# Altium PCB PCB1.PcbDoc
Units mm, origin at the board's own origin, x right, y up, seen from the top; angles counter-clockwise.
Board outline 160 x 55 mm, 4 copper layers (Top Layer, GND, Vs+, Bottom Layer), stack 1.97 mm thick; 41 components, 132 nets, 436 pads, 0 vias.
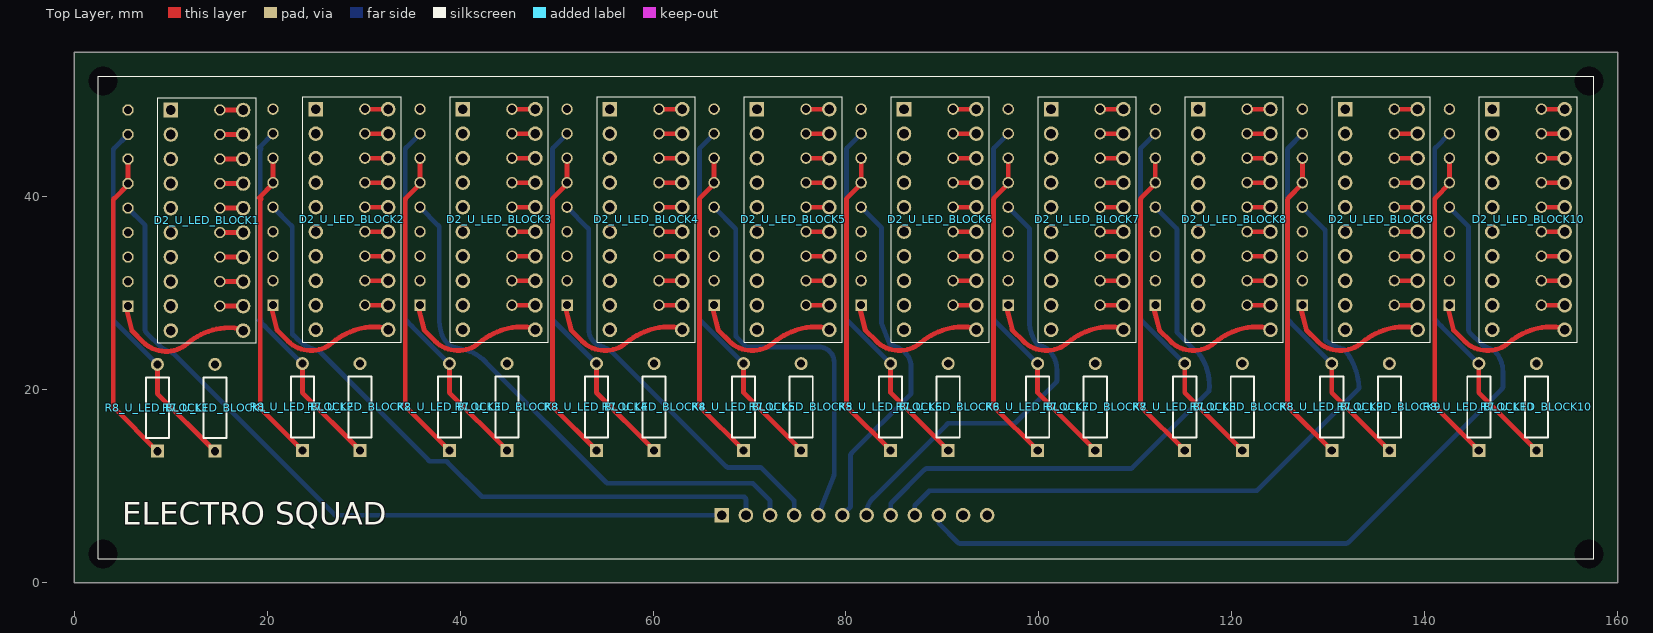
[diagram p0: Top Layer view]
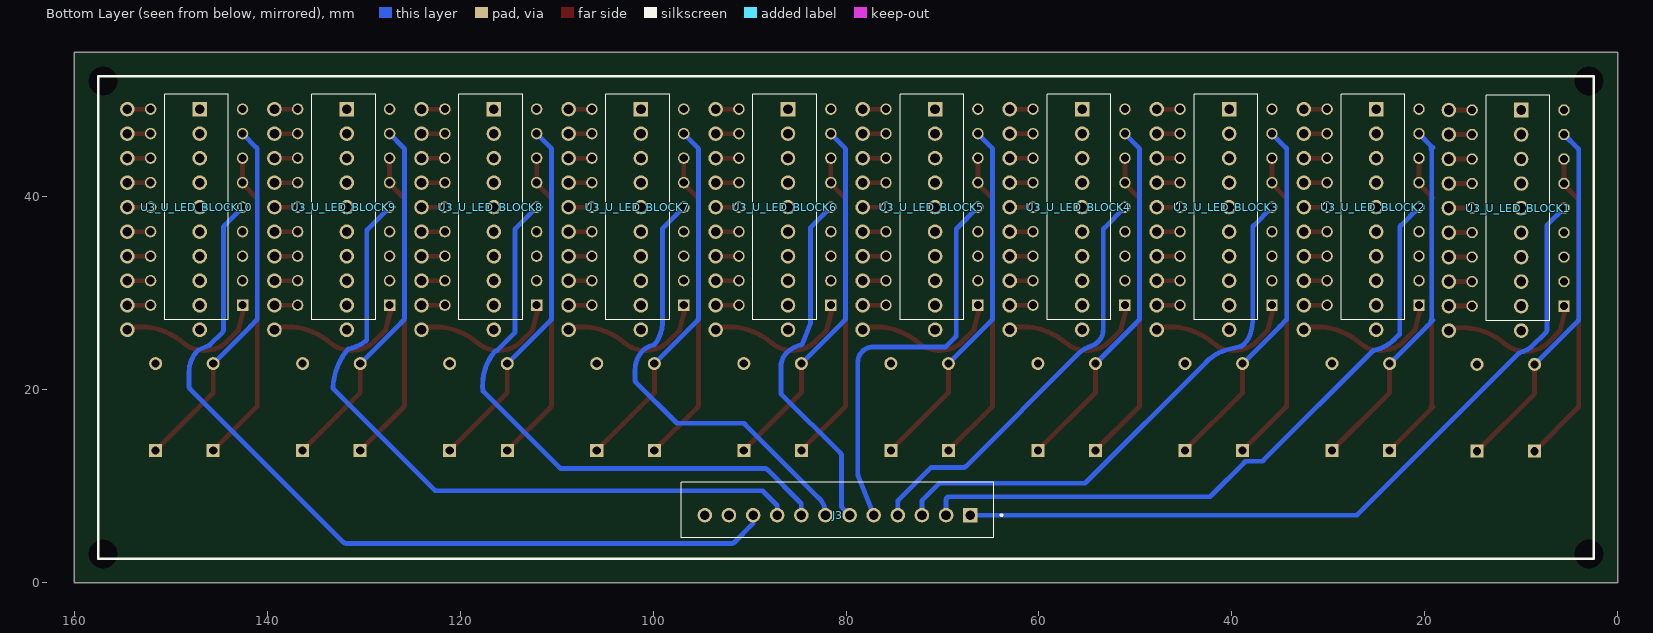
[diagram p1: Bottom Layer view, seen from below]
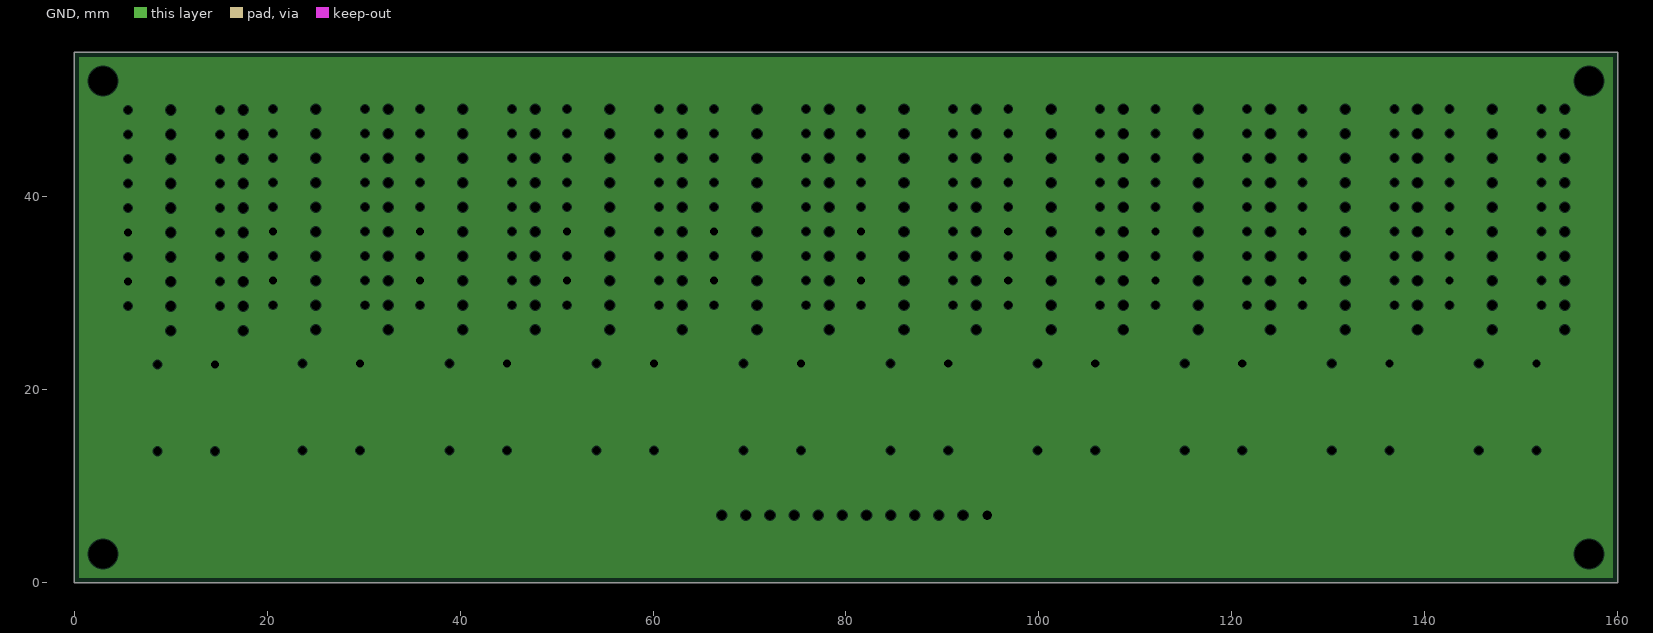
[diagram p2: GND, clearances drawn from the general rule]
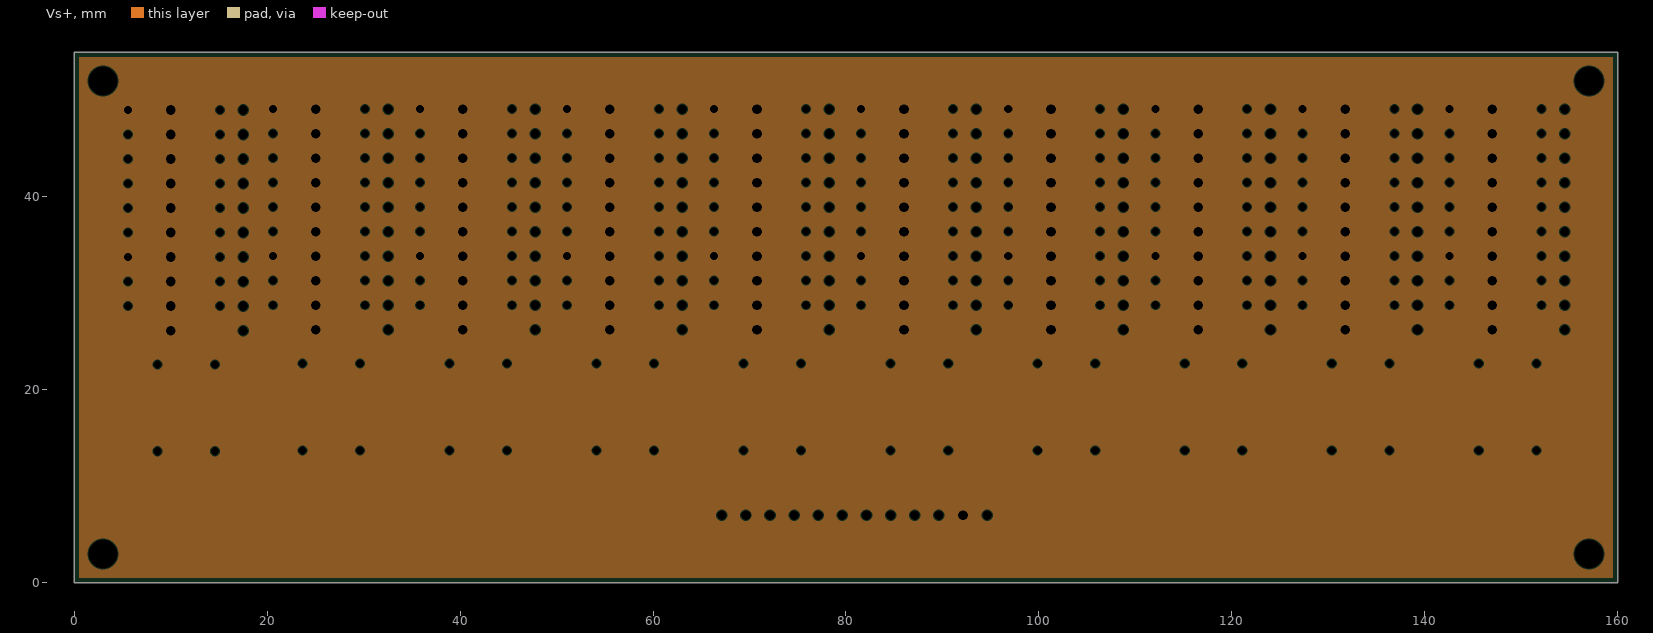
[diagram p3: Vs+, clearances drawn from the general rule]
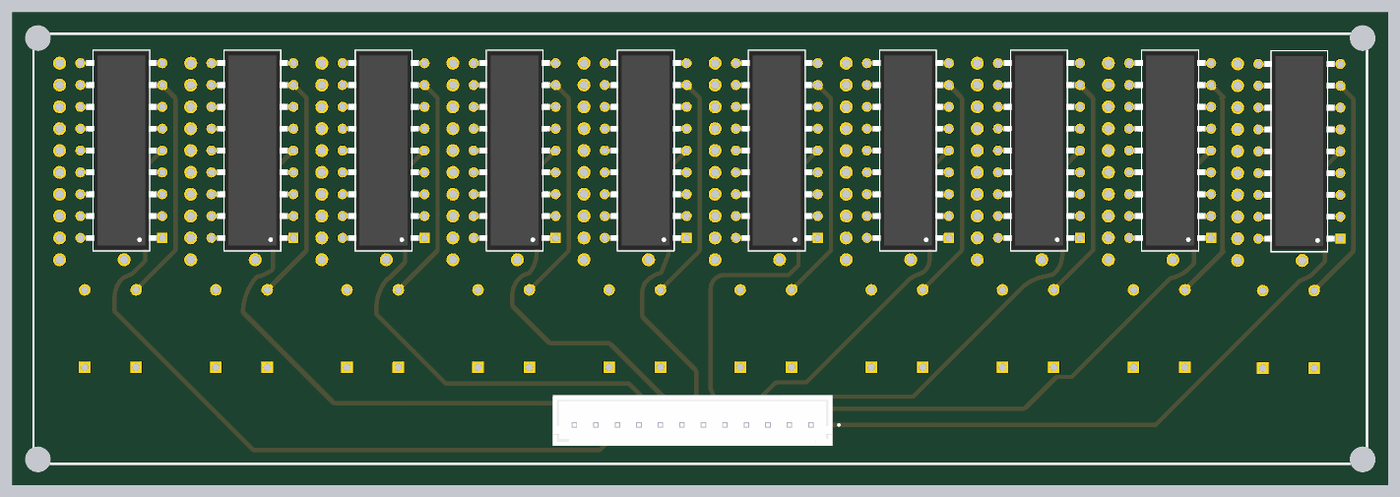
[diagram p4: 3D render of the assembled board from below, using the file's embedded part models]

## Layer stack, top to bottom
Top Solder: solder mask 0.0127, Solder Resist, Dk 3.8
Top Layer: signal copper 0.035
Dielectric 2: prepreg 0.2, 7628, Dk 4.6
GND: plane copper 0.0175, net GND
Dielectric 1: core 1.465, FR-4, Dk 4.5
Vs+: plane copper 0.0175, net Vs+
Dielectric 3: prepreg 0.2, 7628, Dk 4.6
Bottom Layer: signal copper 0.035
Bottom Solder: solder mask 0.0127, Solder Resist, Dk 3.8

## Board outline
0,0 0,55 160,55 160,0

## Design rules (kind name [scope] priority, off if disabled: settings)
BoardOutlineClearance [All] p1: gap=0.2 ignorepadtopadclearanceinfootprint=FALSE
Clearance [All] p1: gap=0.102 ignorepadtopadclearanceinfootprint=FALSE except(0.127: Arc-Via Track-Via SMDPad-Via THPad-Via Via-Via Via-Fill Via-Poly Via-Region Via-Text; 0.25: Arc-Hole Track-Hole SMDPad-Hole THPad-Hole Via-Hole Fill-Hole Poly-Hole Region-Hole Text-Hole)
ComponentClearance [All] p1: gap=0.102 collisioncheckmode=3 verticalgap=0.102 showdistances=TRUE
DiffPairsRouting [All] p1: maxlimit=0.102 minlimit=0.102 mostfreqgap=0.102 toplayer_minwidth=0.102 toplayer_maxwidth=1816.048 toplayer_prefwidth=0.102 bottomlayer_minwidth=0.102 bottomlayer_maxwidth=1816.048 bottomlayer_prefwidth=0.102 maxuncoupledlength=12.7
Height [All] p1: minheight=0 maxheight=1816.048 prefheight=12.7
HoleSize [All] p1: absolutevalues=TRUE maxlimit=6.3 minlimit=0.2 maxpercent=80.000 minpercent=20.000
HoleToHoleClearance [All] p1: gap=0.25 allowstackedmicrovias=FALSE
MinimumAnnularRing [All] p1: minimumring=0.076
MinimumSolderMaskSliver [All] p1: minsoldermaskwidth=0
PlaneClearance [All] p1: clearance=0.102
PlaneConnect PlaneConnectPowerPads [InPadClass('PowerPads')] p1: planeconnectstyle=Direct reliefexpansion=0.508 reliefentries=4 reliefconductorwidth=0.254 reliefairgap=0.254
PlaneConnect [All] p2: pad.planeconnectstyle=Relief pad.reliefexpansion=0.3 pad.reliefentries=4 pad.reliefconductorwidth=0.102 pad.reliefairgap=0.102 via.planeconnectstyle=Direct via.reliefexpansion=0.3 via.reliefentries=4 via.reliefconductorwidth=0.127 via.reliefairgap=0.127
PolygonConnect PolygonConnectPowerPads [All vs (InPadClass('PowerPads'))] p1: connectstyle=Direct reliefconductorwidth=0.254 reliefentries=4 polygonreliefangle="90 Angle" airgapwidth=0.254
PolygonConnect [All] p2: thpad.connectstyle=Relief thpad.reliefconductorwidth=0.102 thpad.reliefentries=4 thpad.polygonreliefangle="90 Angle" thpad.airgapwidth=0.102 smdpad.connectstyle=Relief smdpad.reliefconductorwidth=0.102 smdpad.reliefentries=4 smdpad.polygonreliefangle="90 Angle" smdpad.airgapwidth=0.102 via.connectstyle=Direct via.reliefconductorwidth=0.127 via.reliefentries=4 via.polygonreliefangle="90 Angle" via.airgapwidth=0.127
RoutingVias [All] p1: holewidth=0.2 width=0.45 viastyle="Through Hole" minholewidth=0.2 minwidth=0.45 maxholewidth=6.3 maxwidth=6.55
SilkToSilkClearance [All] p1: silktosilkclearance=0
SilkToSolderMaskClearance [IsPad] p1: minsilkscreentomaskgap=0.102 clearancetoexposedcopper=TRUE
SolderMaskExpansion [All] p1: expansion=0.075 istentingtop=FALSE
Width [All] p1: maxlimit=1816.048 minlimit=0.102 preferedwidth=0.102
20 further rules are at their usual default settings.

## Classes and differential pairs
channel class LED_BLOCK: U_LED_BLOCK1 U_LED_BLOCK2 U_LED_BLOCK3 U_LED_BLOCK4 U_LED_BLOCK5 U_LED_BLOCK6 U_LED_BLOCK7 U_LED_BLOCK8 U_LED_BLOCK9 U_LED_BLOCK10
component class U_LED_BLOCK10: D2_U_LED_BLOCK10 R7_U_LED_BLOCK10 R8_U_LED_BLOCK10 U3_U_LED_BLOCK10
component class U_LED_BLOCK9: D2_U_LED_BLOCK9 R7_U_LED_BLOCK9 R8_U_LED_BLOCK9 U3_U_LED_BLOCK9
component class U_LED_BLOCK8: D2_U_LED_BLOCK8 R7_U_LED_BLOCK8 R8_U_LED_BLOCK8 U3_U_LED_BLOCK8
component class U_LED_BLOCK7: D2_U_LED_BLOCK7 R7_U_LED_BLOCK7 R8_U_LED_BLOCK7 U3_U_LED_BLOCK7
component class U_LED_BLOCK6: D2_U_LED_BLOCK6 R7_U_LED_BLOCK6 R8_U_LED_BLOCK6 U3_U_LED_BLOCK6
component class U_LED_BLOCK5: D2_U_LED_BLOCK5 R7_U_LED_BLOCK5 R8_U_LED_BLOCK5 U3_U_LED_BLOCK5
component class U_LED_BLOCK4: D2_U_LED_BLOCK4 R7_U_LED_BLOCK4 R8_U_LED_BLOCK4 U3_U_LED_BLOCK4
component class U_LED_BLOCK3: D2_U_LED_BLOCK3 R7_U_LED_BLOCK3 R8_U_LED_BLOCK3 U3_U_LED_BLOCK3
component class U_LED_BLOCK2: D2_U_LED_BLOCK2 R7_U_LED_BLOCK2 R8_U_LED_BLOCK2 U3_U_LED_BLOCK2
component class U_LED_BLOCK1: D2_U_LED_BLOCK1 R7_U_LED_BLOCK1 R8_U_LED_BLOCK1 U3_U_LED_BLOCK1
component class Drivers_main: J3

## Components (designator, comment, footprint, x,y, rotation, side; value= is the part's Value field where it differs from the comment)
D2_U_LED_BLOCK1 "DC10EWA" DIP750W50P254L2540H825Q20 13.776,37.566 r0 top (schematic designator D2)
D2_U_LED_BLOCK2 "DC10EWA" DIP750W50P254L2540H825Q20 28.803,37.652 r0 top (schematic designator D2)
D2_U_LED_BLOCK3 "DC10EWA" DIP750W50P254L2540H825Q20 44.043,37.652 r0 top (schematic designator D2)
D2_U_LED_BLOCK4 "DC10EWA" DIP750W50P254L2540H825Q20 59.283,37.652 r0 top (schematic designator D2)
D2_U_LED_BLOCK5 "DC10EWA" DIP750W50P254L2540H825Q20 74.523,37.652 r0 top (schematic designator D2)
D2_U_LED_BLOCK6 "DC10EWA" DIP750W50P254L2540H825Q20 89.763,37.652 r0 top (schematic designator D2)
D2_U_LED_BLOCK7 "DC10EWA" DIP750W50P254L2540H825Q20 105.003,37.652 r0 top (schematic designator D2)
D2_U_LED_BLOCK8 "DC10EWA" DIP750W50P254L2540H825Q20 120.243,37.652 r0 top (schematic designator D2)
D2_U_LED_BLOCK9 "DC10EWA" DIP750W50P254L2540H825Q20 135.483,37.652 r0 top (schematic designator D2)
D2_U_LED_BLOCK10 "DC10EWA" DIP750W50P254L2540H825Q20 150.723,37.652 r0 top (schematic designator D2)
J3 "B12B-XH-A(LF)(SN)" JST_B12B-XH-A(LF)(SN) 80.879,7.529 r180 bottom
R7_U_LED_BLOCK1 "MFR-25FBF5210K" RESA60-630X240 14.605,18.132 r90 top (schematic designator R7)
R7_U_LED_BLOCK2 "MFR-25FBF5210K" RESA60-630X240 29.632,18.218 r90 top (schematic designator R7)
R7_U_LED_BLOCK3 "MFR-25FBF5210K" RESA60-630X240 44.872,18.218 r90 top (schematic designator R7)
R7_U_LED_BLOCK4 "MFR-25FBF5210K" RESA60-630X240 60.112,18.218 r90 top (schematic designator R7)
R7_U_LED_BLOCK5 "MFR-25FBF5210K" RESA60-630X240 75.352,18.218 r90 top (schematic designator R7)
R7_U_LED_BLOCK6 "MFR-25FBF5210K" RESA60-630X240 90.592,18.218 r90 top (schematic designator R7)
R7_U_LED_BLOCK7 "MFR-25FBF5210K" RESA60-630X240 105.832,18.218 r90 top (schematic designator R7)
R7_U_LED_BLOCK8 "MFR-25FBF5210K" RESA60-630X240 121.072,18.218 r90 top (schematic designator R7)
R7_U_LED_BLOCK9 "MFR-25FBF5210K" RESA60-630X240 136.312,18.218 r90 top (schematic designator R7)
R7_U_LED_BLOCK10 "MFR-25FBF5210K" RESA60-630X240 151.552,18.218 r90 top (schematic designator R7)
R8_U_LED_BLOCK1 "MFR-25FBF5210K" RESA60-630X240 8.636,18.132 r90 top (schematic designator R8)
R8_U_LED_BLOCK2 "MFR-25FBF5210K" RESA60-630X240 23.663,18.218 r90 top (schematic designator R8)
R8_U_LED_BLOCK3 "MFR-25FBF5210K" RESA60-630X240 38.903,18.218 r90 top (schematic designator R8)
R8_U_LED_BLOCK4 "MFR-25FBF5210K" RESA60-630X240 54.143,18.218 r90 top (schematic designator R8)
R8_U_LED_BLOCK5 "MFR-25FBF5210K" RESA60-630X240 69.383,18.218 r90 top (schematic designator R8)
R8_U_LED_BLOCK6 "MFR-25FBF5210K" RESA60-630X240 84.623,18.218 r90 top (schematic designator R8)
R8_U_LED_BLOCK7 "MFR-25FBF5210K" RESA60-630X240 99.863,18.218 r90 top (schematic designator R8)
R8_U_LED_BLOCK8 "MFR-25FBF5210K" RESA60-630X240 115.103,18.218 r90 top (schematic designator R8)
R8_U_LED_BLOCK9 "MFR-25FBF5210K" RESA60-630X240 130.343,18.218 r90 top (schematic designator R8)
R8_U_LED_BLOCK10 "MFR-25FBF5210K" RESA60-630X240 145.583,18.218 r90 top (schematic designator R8)
U3_U_LED_BLOCK1 "LM3914N-1" DIP952W45P254L2336H533Q18 10.351,38.836 r0 bottom (schematic designator U3)
U3_U_LED_BLOCK2 "LM3914N-1" DIP952W45P254L2336H533Q18 25.377,38.922 r0 bottom (schematic designator U3)
U3_U_LED_BLOCK3 "LM3914N-1" DIP952W45P254L2336H533Q18 40.617,38.922 r0 bottom (schematic designator U3)
U3_U_LED_BLOCK4 "LM3914N-1" DIP952W45P254L2336H533Q18 55.857,38.922 r0 bottom (schematic designator U3)
U3_U_LED_BLOCK5 "LM3914N-1" DIP952W45P254L2336H533Q18 71.097,38.922 r0 bottom (schematic designator U3)
U3_U_LED_BLOCK6 "LM3914N-1" DIP952W45P254L2336H533Q18 86.337,38.922 r0 bottom (schematic designator U3)
U3_U_LED_BLOCK7 "LM3914N-1" DIP952W45P254L2336H533Q18 101.577,38.922 r0 bottom (schematic designator U3)
U3_U_LED_BLOCK8 "LM3914N-1" DIP952W45P254L2336H533Q18 116.817,38.922 r0 bottom (schematic designator U3)
U3_U_LED_BLOCK9 "LM3914N-1" DIP952W45P254L2336H533Q18 132.057,38.922 r0 bottom (schematic designator U3)
U3_U_LED_BLOCK10 "LM3914N-1" DIP952W45P254L2336H533Q18 147.297,38.922 r0 bottom (schematic designator U3)

## Footprints (in the part's own frame and the unit in brackets; to place one, negate y for a bottom-side part, rotate by r counter-clockwise, add the part's x,y. Pads: shape width x height; smd on the part's side, far side on the other; paste and mask are expansions set on the pad)
DIP750W50P254L2540H825Q20 [mm]
  rect 1.508x1.508 hole 1: 1(-3.75,11.43)
  round 1.508 hole 1: 2(-3.75,8.89) 3(-3.75,6.35) 4(-3.75,3.81) 5(-3.75,1.27) 6(-3.75,-1.27) 7(-3.75,-3.81) 8(-3.75,-6.35) 9(-3.75,-8.89) 10(-3.75,-11.43) 11(3.75,-11.43) 12(3.75,-8.89) 13(3.75,-6.35) 14(3.75,-3.81) 15(3.75,-1.27) 16(3.75,1.27) 17(3.75,3.81) 18(3.75,6.35) 19(3.75,8.89) 20(3.75,11.43)
  silkscreen extent -5.08,-12.7 5.08,12.7
DIP952W45P254L2336H533Q18 [mm]
  rect 1.18x1.18 / inner round 1.18 / far side rect 1.18x1.18 hole 0.83: 1(-4.763,10.16)
  round 1.18 hole 0.83: 2(-4.763,7.62) 3(-4.763,5.08) 4(-4.763,2.54) 5(-4.763,0) 6(-4.763,-2.54) 7(-4.763,-5.08) 8(-4.763,-7.62) 9(-4.763,-10.16) 10(4.763,-10.16) 11(4.763,-7.62) 12(4.763,-5.08) 13(4.763,-2.54) 14(4.763,0) 15(4.763,2.54) 16(4.763,5.08) 17(4.763,7.62) 18(4.763,10.16)
  silkscreen extent -3.3,-11.68 3.3,11.68, body extent -4.17,-11.43 4.17,11.43, height 5.33
JST_B12B-XH-A(LF)(SN) [mm]
  rect 1.508x1.508 / inner round 1.508 / far side rect 1.508x1.508 hole 1: 1(13.75,-0.525)
  round 1.508 hole 1: 2(11.25,-0.525) 3(8.75,-0.525) 4(6.25,-0.525) 5(3.75,-0.525) 6(1.25,-0.525) 7(-1.25,-0.525) 8(-3.75,-0.525) 9(-6.25,-0.525) 10(-8.75,-0.525) 11(-11.25,-0.525) 12(-13.75,-0.525)
  silkscreen extent -16.2,-2.88 17.1,2.88, body extent -16.2,-2.88 16.2,2.88, height 7
RESA60-630X240 [mm] "Axial Resistor, 2-Leads, Dia 2.4mm, Body Length 6.3mm"
  rect 1.35x1.35 hole 0.85: 1(-4.5,0)
  round 1.35 hole 0.85: 2(4.5,0)
  silkscreen extent -3.15,-1.2 3.15,1.2, body extent -3.15,-1.2 3.15,1.2, height 2.4

## Part data
D2_U_LED_BLOCK1 D2_U_LED_BLOCK2 D2_U_LED_BLOCK3 D2_U_LED_BLOCK4 D2_U_LED_BLOCK5 D2_U_LED_BLOCK6 D2_U_LED_BLOCK7 D2_U_LED_BLOCK8 D2_U_LED_BLOCK9 D2_U_LED_BLOCK10: "LED Circuit Board Indicator Bar - 10 Wide, DIP Red (x 10) Diffused, White 2V 30mA Through Hole", Package="DIP-20 Kingbright", Availability="In Stock", Check_prices=https://www.snapeda.com/parts/DC10EWA/Kingbright/view-part/268697/?ref=eda, MF=Kingbright, MP=DC10EWA, Price=None, Purchase-URL=https://pricing.snapeda.com/search/part/DC10EWA/?ref=eda, SnapEDA_Link=https://www.snapeda.com/parts/DC10EWA/Kingbright/view-part/268697/?ref=snap
J3: "Connector Header Through Hole 12 position 0.098 (2.50mm)", Package=None, Check_prices=https://www.snapeda.com/parts/B12B-XH-A(LF)(SN)/JST+Sales+America+Inc./view-part/?ref=eda, MF="JST Sales", MP=B12B-XH-A(LF)(SN), SnapEDA_Link=https://www.snapeda.com/parts/B12B-XH-A(LF)(SN)/JST+Sales+America+Inc./view-part/?ref=snap
R7_U_LED_BLOCK1 R7_U_LED_BLOCK2 R7_U_LED_BLOCK3 R7_U_LED_BLOCK4 R7_U_LED_BLOCK5 R7_U_LED_BLOCK6 R7_U_LED_BLOCK7 R7_U_LED_BLOCK8 R7_U_LED_BLOCK9 R7_U_LED_BLOCK10 R8_U_LED_BLOCK1 R8_U_LED_BLOCK2 R8_U_LED_BLOCK3 R8_U_LED_BLOCK4 R8_U_LED_BLOCK5 R8_U_LED_BLOCK6 R8_U_LED_BLOCK7 R8_U_LED_BLOCK8 R8_U_LED_BLOCK9 R8_U_LED_BLOCK10: library part CMP-1659-00074-2, "Axial Resistor, 10 KOhm, +/- 1%, 0.25 W, -55 to 155 degC, 2-Pin THD, RoHS, Bulk", Case\/Package=Axial, Manufacturer=Yageo, Max Operating Temperature=155degC, Max Power Dissipation=250mW, Min Operating Temperature=-55degC, Package Description="2-Pin Axial Lead, Dia 2.4 mm, Body Length 6.3 mm", Package Quantity=200, Package Reference=MFR-25, Resistance=10KOhm, Temperature Coefficient=100ppm\/degreesC, Tolerance=1%, Voltage Rating=250V, Voltage Rating (DC)=200V, Composition=MetalFilm, Datasheet URL=http://www.yageo.com/documents/recent/Yageo%20LR_MFR_2013.pdf, Datasheet Version=04/2013, Lead Free=LeadFree, Length=0.248inch, Manufacturer URL=http://www.yageo.com/, Military Standard=Not, Mount=ThroughHole, Mounting Technology=ThroughHole, Number of Terminations=2, Packaging=Bulk, Power Rating=250mW, RoHSCompliant=True, Termination=Axial
U3_U_LED_BLOCK1 U3_U_LED_BLOCK2 U3_U_LED_BLOCK3 U3_U_LED_BLOCK4 U3_U_LED_BLOCK5 U3_U_LED_BLOCK6 U3_U_LED_BLOCK7 U3_U_LED_BLOCK8 U3_U_LED_BLOCK9 U3_U_LED_BLOCK10: "LED, LCD, Vacuum Fluorescent (VF) Driver 18-PDIP", Package="DIP-18 Texas Instruments", Check_prices=https://www.snapeda.com/parts/LM3914N-1/Texas+Instruments/view-part/?ref=eda, MF="Texas Instruments", MP=LM3914N-1, SnapEDA_Link=https://www.snapeda.com/parts/LM3914N-1/Texas+Instruments/view-part/?ref=snap

## Free pads (board coordinates)
  round 1.524 hole 3 unplated: 2(3,3) 2(3,52) 2(157,3) 2(157,52)

## Nets (pads, with @x,y where several pads share a name; then routed paths per layer and width w, separated by ;. In a path a pad name is that pad's centre, name@x,y a point inside that pad or via, vN(x,y) a via of type N, cw(c..) or ccw(c..) an arc to the next point about the centre after c; other vN are vias at no path point)
GND: J3.12 R7_U_LED_BLOCK1.2 R7_U_LED_BLOCK2.2 R7_U_LED_BLOCK3.2 R7_U_LED_BLOCK4.2 R7_U_LED_BLOCK5.2 R7_U_LED_BLOCK6.2 R7_U_LED_BLOCK7.2 R7_U_LED_BLOCK8.2 R7_U_LED_BLOCK9.2 R7_U_LED_BLOCK10.2 U3_U_LED_BLOCK1.2 U3_U_LED_BLOCK1.4 U3_U_LED_BLOCK2.2 U3_U_LED_BLOCK2.4 U3_U_LED_BLOCK3.2 U3_U_LED_BLOCK3.4 U3_U_LED_BLOCK4.2 U3_U_LED_BLOCK4.4 U3_U_LED_BLOCK5.2 U3_U_LED_BLOCK5.4 U3_U_LED_BLOCK6.2 U3_U_LED_BLOCK6.4 U3_U_LED_BLOCK7.2 U3_U_LED_BLOCK7.4 U3_U_LED_BLOCK8.2 U3_U_LED_BLOCK8.4 U3_U_LED_BLOCK9.2 U3_U_LED_BLOCK9.4 U3_U_LED_BLOCK10.2 U3_U_LED_BLOCK10.4
NetD2_U_LED_BLOCK1_11: D2_U_LED_BLOCK1.11 U3_U_LED_BLOCK1.1 | length 15.6
  Top Layer w0.5: U3_U_LED_BLOCK1.1 5.448,28.336 ccw(c5.741,28.358) 5.456,28.285 5.99,26.173 ccw(c6.276,26.245) 6.067,26.038 7.129,24.975 ccw(c9.54,27.375) 11.755,24.794 cw(c16.19,19.63) 16.44,26.433 cw(c16.347,24.055) 17.297,26.237 D2_U_LED_BLOCK1.11
NetD2_U_LED_BLOCK1_12: D2_U_LED_BLOCK1.12 U3_U_LED_BLOCK1.18 | length 2.4
  Top Layer w0.5: U3_U_LED_BLOCK1.18 D2_U_LED_BLOCK1.12
NetD2_U_LED_BLOCK1_13: D2_U_LED_BLOCK1.13 U3_U_LED_BLOCK1.17 | length 2.4
  Top Layer w0.5: U3_U_LED_BLOCK1.17 D2_U_LED_BLOCK1.13
NetD2_U_LED_BLOCK1_14: D2_U_LED_BLOCK1.14 U3_U_LED_BLOCK1.16 | length 2.4
  Top Layer w0.5: U3_U_LED_BLOCK1.16 D2_U_LED_BLOCK1.14
NetD2_U_LED_BLOCK1_15: D2_U_LED_BLOCK1.15 U3_U_LED_BLOCK1.15 | length 2.4
  Top Layer w0.5: U3_U_LED_BLOCK1.15 D2_U_LED_BLOCK1.15
NetD2_U_LED_BLOCK1_16: D2_U_LED_BLOCK1.16 U3_U_LED_BLOCK1.14 | length 2.4
  Top Layer w0.5: U3_U_LED_BLOCK1.14 D2_U_LED_BLOCK1.16
NetD2_U_LED_BLOCK1_17: D2_U_LED_BLOCK1.17 U3_U_LED_BLOCK1.13 | length 2.4
  Top Layer w0.5: U3_U_LED_BLOCK1.13 D2_U_LED_BLOCK1.17
NetD2_U_LED_BLOCK1_18: D2_U_LED_BLOCK1.18 U3_U_LED_BLOCK1.12 | length 2.4
  Top Layer w0.5: U3_U_LED_BLOCK1.12 D2_U_LED_BLOCK1.18
NetD2_U_LED_BLOCK1_19: D2_U_LED_BLOCK1.19 U3_U_LED_BLOCK1.11 | length 2.4
  Top Layer w0.5: U3_U_LED_BLOCK1.11 D2_U_LED_BLOCK1.19
NetD2_U_LED_BLOCK1_20: D2_U_LED_BLOCK1.20 U3_U_LED_BLOCK1.10 | length 2.4
  Top Layer w0.5: U3_U_LED_BLOCK1.10 D2_U_LED_BLOCK1.20
NetD2_U_LED_BLOCK2_11: D2_U_LED_BLOCK2.11 U3_U_LED_BLOCK2.1 | length 15.6
  Top Layer w0.5: U3_U_LED_BLOCK2.1 20.474,28.422 ccw(c20.768,28.444) 20.483,28.372 21.017,26.259 ccw(c21.302,26.332) 21.093,26.124 22.156,25.062 ccw(c24.566,27.461) 26.781,24.88 cw(c31.217,19.716) 31.467,26.519 cw(c31.374,24.141) 32.324,26.323 D2_U_LED_BLOCK2.11
NetD2_U_LED_BLOCK2_12: D2_U_LED_BLOCK2.12 U3_U_LED_BLOCK2.18 | length 2.4
  Top Layer w0.5: U3_U_LED_BLOCK2.18 D2_U_LED_BLOCK2.12
NetD2_U_LED_BLOCK2_13: D2_U_LED_BLOCK2.13 U3_U_LED_BLOCK2.17 | length 2.4
  Top Layer w0.5: U3_U_LED_BLOCK2.17 D2_U_LED_BLOCK2.13
NetD2_U_LED_BLOCK2_14: D2_U_LED_BLOCK2.14 U3_U_LED_BLOCK2.16 | length 2.4
  Top Layer w0.5: U3_U_LED_BLOCK2.16 D2_U_LED_BLOCK2.14
NetD2_U_LED_BLOCK2_15: D2_U_LED_BLOCK2.15 U3_U_LED_BLOCK2.15 | length 2.4
  Top Layer w0.5: U3_U_LED_BLOCK2.15 D2_U_LED_BLOCK2.15
NetD2_U_LED_BLOCK2_16: D2_U_LED_BLOCK2.16 U3_U_LED_BLOCK2.14 | length 2.4
  Top Layer w0.5: U3_U_LED_BLOCK2.14 D2_U_LED_BLOCK2.16
NetD2_U_LED_BLOCK2_17: D2_U_LED_BLOCK2.17 U3_U_LED_BLOCK2.13 | length 2.4
  Top Layer w0.5: U3_U_LED_BLOCK2.13 D2_U_LED_BLOCK2.17
NetD2_U_LED_BLOCK2_18: D2_U_LED_BLOCK2.18 U3_U_LED_BLOCK2.12 | length 2.4
  Top Layer w0.5: U3_U_LED_BLOCK2.12 D2_U_LED_BLOCK2.18
NetD2_U_LED_BLOCK2_19: D2_U_LED_BLOCK2.19 U3_U_LED_BLOCK2.11 | length 2.4
  Top Layer w0.5: U3_U_LED_BLOCK2.11 D2_U_LED_BLOCK2.19
NetD2_U_LED_BLOCK2_20: D2_U_LED_BLOCK2.20 U3_U_LED_BLOCK2.10 | length 2.4
  Top Layer w0.5: U3_U_LED_BLOCK2.10 D2_U_LED_BLOCK2.20
NetD2_U_LED_BLOCK3_11: D2_U_LED_BLOCK3.11 U3_U_LED_BLOCK3.1 | length 15.6
  Top Layer w0.5: U3_U_LED_BLOCK3.1 35.714,28.422 ccw(c36.008,28.444) 35.723,28.372 36.257,26.259 ccw(c36.542,26.332) 36.333,26.124 37.396,25.062 ccw(c39.806,27.461) 42.021,24.88 cw(c46.457,19.716) 46.707,26.519 cw(c46.614,24.141) 47.564,26.323 D2_U_LED_BLOCK3.11
NetD2_U_LED_BLOCK3_12: D2_U_LED_BLOCK3.12 U3_U_LED_BLOCK3.18 | length 2.4
  Top Layer w0.5: U3_U_LED_BLOCK3.18 D2_U_LED_BLOCK3.12
NetD2_U_LED_BLOCK3_13: D2_U_LED_BLOCK3.13 U3_U_LED_BLOCK3.17 | length 2.4
  Top Layer w0.5: U3_U_LED_BLOCK3.17 D2_U_LED_BLOCK3.13
NetD2_U_LED_BLOCK3_14: D2_U_LED_BLOCK3.14 U3_U_LED_BLOCK3.16 | length 2.4
  Top Layer w0.5: U3_U_LED_BLOCK3.16 D2_U_LED_BLOCK3.14
NetD2_U_LED_BLOCK3_15: D2_U_LED_BLOCK3.15 U3_U_LED_BLOCK3.15 | length 2.4
  Top Layer w0.5: U3_U_LED_BLOCK3.15 D2_U_LED_BLOCK3.15
NetD2_U_LED_BLOCK3_16: D2_U_LED_BLOCK3.16 U3_U_LED_BLOCK3.14 | length 2.4
  Top Layer w0.5: U3_U_LED_BLOCK3.14 D2_U_LED_BLOCK3.16
NetD2_U_LED_BLOCK3_17: D2_U_LED_BLOCK3.17 U3_U_LED_BLOCK3.13 | length 2.4
  Top Layer w0.5: U3_U_LED_BLOCK3.13 D2_U_LED_BLOCK3.17
NetD2_U_LED_BLOCK3_18: D2_U_LED_BLOCK3.18 U3_U_LED_BLOCK3.12 | length 2.4
  Top Layer w0.5: U3_U_LED_BLOCK3.12 D2_U_LED_BLOCK3.18
NetD2_U_LED_BLOCK3_19: D2_U_LED_BLOCK3.19 U3_U_LED_BLOCK3.11 | length 2.4
  Top Layer w0.5: U3_U_LED_BLOCK3.11 D2_U_LED_BLOCK3.19
NetD2_U_LED_BLOCK3_20: D2_U_LED_BLOCK3.20 U3_U_LED_BLOCK3.10 | length 2.4
  Top Layer w0.5: U3_U_LED_BLOCK3.10 D2_U_LED_BLOCK3.20
NetD2_U_LED_BLOCK4_11: D2_U_LED_BLOCK4.11 U3_U_LED_BLOCK4.1 | length 15.6
  Top Layer w0.5: U3_U_LED_BLOCK4.1 50.954,28.422 ccw(c51.248,28.444) 50.963,28.372 51.497,26.259 ccw(c51.782,26.332) 51.573,26.124 52.636,25.062 ccw(c55.046,27.461) 57.261,24.88 cw(c61.697,19.716) 61.947,26.519 cw(c61.854,24.141) 62.804,26.323 D2_U_LED_BLOCK4.11
NetD2_U_LED_BLOCK4_12: D2_U_LED_BLOCK4.12 U3_U_LED_BLOCK4.18 | length 2.4
  Top Layer w0.5: U3_U_LED_BLOCK4.18 D2_U_LED_BLOCK4.12
NetD2_U_LED_BLOCK4_13: D2_U_LED_BLOCK4.13 U3_U_LED_BLOCK4.17 | length 2.4
  Top Layer w0.5: U3_U_LED_BLOCK4.17 D2_U_LED_BLOCK4.13
NetD2_U_LED_BLOCK4_14: D2_U_LED_BLOCK4.14 U3_U_LED_BLOCK4.16 | length 2.4
  Top Layer w0.5: U3_U_LED_BLOCK4.16 D2_U_LED_BLOCK4.14
NetD2_U_LED_BLOCK4_15: D2_U_LED_BLOCK4.15 U3_U_LED_BLOCK4.15 | length 2.4
  Top Layer w0.5: U3_U_LED_BLOCK4.15 D2_U_LED_BLOCK4.15
NetD2_U_LED_BLOCK4_16: D2_U_LED_BLOCK4.16 U3_U_LED_BLOCK4.14 | length 2.4
  Top Layer w0.5: U3_U_LED_BLOCK4.14 D2_U_LED_BLOCK4.16
NetD2_U_LED_BLOCK4_17: D2_U_LED_BLOCK4.17 U3_U_LED_BLOCK4.13 | length 2.4
  Top Layer w0.5: U3_U_LED_BLOCK4.13 D2_U_LED_BLOCK4.17
NetD2_U_LED_BLOCK4_18: D2_U_LED_BLOCK4.18 U3_U_LED_BLOCK4.12 | length 2.4
  Top Layer w0.5: U3_U_LED_BLOCK4.12 D2_U_LED_BLOCK4.18
NetD2_U_LED_BLOCK4_19: D2_U_LED_BLOCK4.19 U3_U_LED_BLOCK4.11 | length 2.4
  Top Layer w0.5: U3_U_LED_BLOCK4.11 D2_U_LED_BLOCK4.19
NetD2_U_LED_BLOCK4_20: D2_U_LED_BLOCK4.20 U3_U_LED_BLOCK4.10 | length 2.4
  Top Layer w0.5: U3_U_LED_BLOCK4.10 D2_U_LED_BLOCK4.20
NetD2_U_LED_BLOCK5_11: D2_U_LED_BLOCK5.11 U3_U_LED_BLOCK5.1 | length 15.6
  Top Layer w0.5: U3_U_LED_BLOCK5.1 66.194,28.422 ccw(c66.488,28.444) 66.203,28.372 66.737,26.259 ccw(c67.022,26.332) 66.813,26.124 67.876,25.062 ccw(c70.286,27.461) 72.501,24.88 cw(c76.937,19.716) 77.187,26.519 cw(c77.094,24.141) 78.044,26.323 D2_U_LED_BLOCK5.11
NetD2_U_LED_BLOCK5_12: D2_U_LED_BLOCK5.12 U3_U_LED_BLOCK5.18 | length 2.4
  Top Layer w0.5: U3_U_LED_BLOCK5.18 D2_U_LED_BLOCK5.12
NetD2_U_LED_BLOCK5_13: D2_U_LED_BLOCK5.13 U3_U_LED_BLOCK5.17 | length 2.4
  Top Layer w0.5: U3_U_LED_BLOCK5.17 D2_U_LED_BLOCK5.13
NetD2_U_LED_BLOCK5_14: D2_U_LED_BLOCK5.14 U3_U_LED_BLOCK5.16 | length 2.4
  Top Layer w0.5: U3_U_LED_BLOCK5.16 D2_U_LED_BLOCK5.14
NetD2_U_LED_BLOCK5_15: D2_U_LED_BLOCK5.15 U3_U_LED_BLOCK5.15 | length 2.4
  Top Layer w0.5: U3_U_LED_BLOCK5.15 D2_U_LED_BLOCK5.15
NetD2_U_LED_BLOCK5_16: D2_U_LED_BLOCK5.16 U3_U_LED_BLOCK5.14 | length 2.4
  Top Layer w0.5: U3_U_LED_BLOCK5.14 D2_U_LED_BLOCK5.16
NetD2_U_LED_BLOCK5_17: D2_U_LED_BLOCK5.17 U3_U_LED_BLOCK5.13 | length 2.4
  Top Layer w0.5: U3_U_LED_BLOCK5.13 D2_U_LED_BLOCK5.17
NetD2_U_LED_BLOCK5_18: D2_U_LED_BLOCK5.18 U3_U_LED_BLOCK5.12 | length 2.4
  Top Layer w0.5: U3_U_LED_BLOCK5.12 D2_U_LED_BLOCK5.18
NetD2_U_LED_BLOCK5_19: D2_U_LED_BLOCK5.19 U3_U_LED_BLOCK5.11 | length 2.4
  Top Layer w0.5: U3_U_LED_BLOCK5.11 D2_U_LED_BLOCK5.19
NetD2_U_LED_BLOCK5_20: D2_U_LED_BLOCK5.20 U3_U_LED_BLOCK5.10 | length 2.4
  Top Layer w0.5: U3_U_LED_BLOCK5.10 D2_U_LED_BLOCK5.20
NetD2_U_LED_BLOCK6_11: D2_U_LED_BLOCK6.11 U3_U_LED_BLOCK6.1 | length 15.6
  Top Layer w0.5: U3_U_LED_BLOCK6.1 81.434,28.422 ccw(c81.728,28.444) 81.443,28.372 81.977,26.259 ccw(c82.262,26.332) 82.053,26.124 83.116,25.062 ccw(c85.526,27.461) 87.741,24.88 cw(c92.177,19.716) 92.427,26.519 cw(c92.334,24.141) 93.284,26.323 D2_U_LED_BLOCK6.11
NetD2_U_LED_BLOCK6_12: D2_U_LED_BLOCK6.12 U3_U_LED_BLOCK6.18 | length 2.4
  Top Layer w0.5: U3_U_LED_BLOCK6.18 D2_U_LED_BLOCK6.12
NetD2_U_LED_BLOCK6_13: D2_U_LED_BLOCK6.13 U3_U_LED_BLOCK6.17 | length 2.4
  Top Layer w0.5: U3_U_LED_BLOCK6.17 D2_U_LED_BLOCK6.13
NetD2_U_LED_BLOCK6_14: D2_U_LED_BLOCK6.14 U3_U_LED_BLOCK6.16 | length 2.4
  Top Layer w0.5: U3_U_LED_BLOCK6.16 D2_U_LED_BLOCK6.14
NetD2_U_LED_BLOCK6_15: D2_U_LED_BLOCK6.15 U3_U_LED_BLOCK6.15 | length 2.4
  Top Layer w0.5: U3_U_LED_BLOCK6.15 D2_U_LED_BLOCK6.15
NetD2_U_LED_BLOCK6_16: D2_U_LED_BLOCK6.16 U3_U_LED_BLOCK6.14 | length 2.4
  Top Layer w0.5: U3_U_LED_BLOCK6.14 D2_U_LED_BLOCK6.16
NetD2_U_LED_BLOCK6_17: D2_U_LED_BLOCK6.17 U3_U_LED_BLOCK6.13 | length 2.4
  Top Layer w0.5: U3_U_LED_BLOCK6.13 D2_U_LED_BLOCK6.17
NetD2_U_LED_BLOCK6_18: D2_U_LED_BLOCK6.18 U3_U_LED_BLOCK6.12 | length 2.4
  Top Layer w0.5: U3_U_LED_BLOCK6.12 D2_U_LED_BLOCK6.18
NetD2_U_LED_BLOCK6_19: D2_U_LED_BLOCK6.19 U3_U_LED_BLOCK6.11 | length 2.4
  Top Layer w0.5: U3_U_LED_BLOCK6.11 D2_U_LED_BLOCK6.19
NetD2_U_LED_BLOCK6_20: D2_U_LED_BLOCK6.20 U3_U_LED_BLOCK6.10 | length 2.4
  Top Layer w0.5: U3_U_LED_BLOCK6.10 D2_U_LED_BLOCK6.20
NetD2_U_LED_BLOCK7_11: D2_U_LED_BLOCK7.11 U3_U_LED_BLOCK7.1 | length 15.6
  Top Layer w0.5: U3_U_LED_BLOCK7.1 96.674,28.422 ccw(c96.968,28.444) 96.683,28.372 97.217,26.259 ccw(c97.502,26.332) 97.293,26.124 98.356,25.062 ccw(c100.766,27.461) 102.981,24.88 cw(c107.417,19.716) 107.667,26.519 cw(c107.574,24.141) 108.524,26.323 D2_U_LED_BLOCK7.11
NetD2_U_LED_BLOCK7_12: D2_U_LED_BLOCK7.12 U3_U_LED_BLOCK7.18 | length 2.4
  Top Layer w0.5: U3_U_LED_BLOCK7.18 D2_U_LED_BLOCK7.12
NetD2_U_LED_BLOCK7_13: D2_U_LED_BLOCK7.13 U3_U_LED_BLOCK7.17 | length 2.4
  Top Layer w0.5: U3_U_LED_BLOCK7.17 D2_U_LED_BLOCK7.13
NetD2_U_LED_BLOCK7_14: D2_U_LED_BLOCK7.14 U3_U_LED_BLOCK7.16 | length 2.4
  Top Layer w0.5: U3_U_LED_BLOCK7.16 D2_U_LED_BLOCK7.14
NetD2_U_LED_BLOCK7_15: D2_U_LED_BLOCK7.15 U3_U_LED_BLOCK7.15 | length 2.4
  Top Layer w0.5: U3_U_LED_BLOCK7.15 D2_U_LED_BLOCK7.15
NetD2_U_LED_BLOCK7_16: D2_U_LED_BLOCK7.16 U3_U_LED_BLOCK7.14 | length 2.4
  Top Layer w0.5: U3_U_LED_BLOCK7.14 D2_U_LED_BLOCK7.16
NetD2_U_LED_BLOCK7_17: D2_U_LED_BLOCK7.17 U3_U_LED_BLOCK7.13 | length 2.4
  Top Layer w0.5: U3_U_LED_BLOCK7.13 D2_U_LED_BLOCK7.17
NetD2_U_LED_BLOCK7_18: D2_U_LED_BLOCK7.18 U3_U_LED_BLOCK7.12 | length 2.4
  Top Layer w0.5: U3_U_LED_BLOCK7.12 D2_U_LED_BLOCK7.18
NetD2_U_LED_BLOCK7_19: D2_U_LED_BLOCK7.19 U3_U_LED_BLOCK7.11 | length 2.4
  Top Layer w0.5: U3_U_LED_BLOCK7.11 D2_U_LED_BLOCK7.19
NetD2_U_LED_BLOCK7_20: D2_U_LED_BLOCK7.20 U3_U_LED_BLOCK7.10 | length 2.4
  Top Layer w0.5: U3_U_LED_BLOCK7.10 D2_U_LED_BLOCK7.20
NetD2_U_LED_BLOCK8_11: D2_U_LED_BLOCK8.11 U3_U_LED_BLOCK8.1 | length 15.6
  Top Layer w0.5: U3_U_LED_BLOCK8.1 111.914,28.422 ccw(c112.208,28.444) 111.923,28.372 112.457,26.259 ccw(c112.742,26.332) 112.533,26.124 113.596,25.062 ccw(c116.006,27.461) 118.221,24.88 cw(c122.657,19.716) 122.907,26.519 cw(c122.814,24.141) 123.764,26.323 D2_U_LED_BLOCK8.11
NetD2_U_LED_BLOCK8_12: D2_U_LED_BLOCK8.12 U3_U_LED_BLOCK8.18 | length 2.4
  Top Layer w0.5: U3_U_LED_BLOCK8.18 D2_U_LED_BLOCK8.12
NetD2_U_LED_BLOCK8_13: D2_U_LED_BLOCK8.13 U3_U_LED_BLOCK8.17 | length 2.4
  Top Layer w0.5: U3_U_LED_BLOCK8.17 D2_U_LED_BLOCK8.13
NetD2_U_LED_BLOCK8_14: D2_U_LED_BLOCK8.14 U3_U_LED_BLOCK8.16 | length 2.4
  Top Layer w0.5: U3_U_LED_BLOCK8.16 D2_U_LED_BLOCK8.14
NetD2_U_LED_BLOCK8_15: D2_U_LED_BLOCK8.15 U3_U_LED_BLOCK8.15 | length 2.4
  Top Layer w0.5: U3_U_LED_BLOCK8.15 D2_U_LED_BLOCK8.15
NetD2_U_LED_BLOCK8_16: D2_U_LED_BLOCK8.16 U3_U_LED_BLOCK8.14 | length 2.4
  Top Layer w0.5: U3_U_LED_BLOCK8.14 D2_U_LED_BLOCK8.16
NetD2_U_LED_BLOCK8_17: D2_U_LED_BLOCK8.17 U3_U_LED_BLOCK8.13 | length 2.4
  Top Layer w0.5: U3_U_LED_BLOCK8.13 D2_U_LED_BLOCK8.17
NetD2_U_LED_BLOCK8_18: D2_U_LED_BLOCK8.18 U3_U_LED_BLOCK8.12 | length 2.4
  Top Layer w0.5: U3_U_LED_BLOCK8.12 D2_U_LED_BLOCK8.18
NetD2_U_LED_BLOCK8_19: D2_U_LED_BLOCK8.19 U3_U_LED_BLOCK8.11 | length 2.4
  Top Layer w0.5: U3_U_LED_BLOCK8.11 D2_U_LED_BLOCK8.19
NetD2_U_LED_BLOCK8_20: D2_U_LED_BLOCK8.20 U3_U_LED_BLOCK8.10 | length 2.4
  Top Layer w0.5: U3_U_LED_BLOCK8.10 D2_U_LED_BLOCK8.20
NetD2_U_LED_BLOCK9_11: D2_U_LED_BLOCK9.11 U3_U_LED_BLOCK9.1 | length 15.6
  Top Layer w0.5: U3_U_LED_BLOCK9.1 127.154,28.422 ccw(c127.448,28.444) 127.163,28.372 127.697,26.259 ccw(c127.982,26.332) 127.773,26.124 128.836,25.062 ccw(c131.246,27.461) 133.461,24.88 cw(c137.897,19.716) 138.147,26.519 cw(c138.054,24.141) 139.004,26.323 D2_U_LED_BLOCK9.11
NetD2_U_LED_BLOCK9_12: D2_U_LED_BLOCK9.12 U3_U_LED_BLOCK9.18 | length 2.4
  Top Layer w0.5: U3_U_LED_BLOCK9.18 D2_U_LED_BLOCK9.12
NetD2_U_LED_BLOCK9_13: D2_U_LED_BLOCK9.13 U3_U_LED_BLOCK9.17 | length 2.4
  Top Layer w0.5: U3_U_LED_BLOCK9.17 D2_U_LED_BLOCK9.13
NetD2_U_LED_BLOCK9_14: D2_U_LED_BLOCK9.14 U3_U_LED_BLOCK9.16 | length 2.4
  Top Layer w0.5: U3_U_LED_BLOCK9.16 D2_U_LED_BLOCK9.14
NetD2_U_LED_BLOCK9_15: D2_U_LED_BLOCK9.15 U3_U_LED_BLOCK9.15 | length 2.4
  Top Layer w0.5: U3_U_LED_BLOCK9.15 D2_U_LED_BLOCK9.15
NetD2_U_LED_BLOCK9_16: D2_U_LED_BLOCK9.16 U3_U_LED_BLOCK9.14 | length 2.4
  Top Layer w0.5: U3_U_LED_BLOCK9.14 D2_U_LED_BLOCK9.16
NetD2_U_LED_BLOCK9_17: D2_U_LED_BLOCK9.17 U3_U_LED_BLOCK9.13 | length 2.4
  Top Layer w0.5: U3_U_LED_BLOCK9.13 D2_U_LED_BLOCK9.17
NetD2_U_LED_BLOCK9_18: D2_U_LED_BLOCK9.18 U3_U_LED_BLOCK9.12 | length 2.4
  Top Layer w0.5: U3_U_LED_BLOCK9.12 D2_U_LED_BLOCK9.18
NetD2_U_LED_BLOCK9_19: D2_U_LED_BLOCK9.19 U3_U_LED_BLOCK9.11 | length 2.4
  Top Layer w0.5: U3_U_LED_BLOCK9.11 D2_U_LED_BLOCK9.19
NetD2_U_LED_BLOCK9_20: D2_U_LED_BLOCK9.20 U3_U_LED_BLOCK9.10 | length 2.4
  Top Layer w0.5: U3_U_LED_BLOCK9.10 D2_U_LED_BLOCK9.20
NetD2_U_LED_BLOCK10_11: D2_U_LED_BLOCK10.11 U3_U_LED_BLOCK10.1 | length 15.6
  Top Layer w0.5: U3_U_LED_BLOCK10.1 142.394,28.422 ccw(c142.688,28.444) 142.403,28.372 142.937,26.259 ccw(c143.222,26.332) 143.013,26.124 144.076,25.062 ccw(c146.486,27.461) 148.701,24.88 cw(c153.137,19.716) 153.387,26.519 cw(c153.294,24.141) 154.244,26.323 D2_U_LED_BLOCK10.11
NetD2_U_LED_BLOCK10_12: D2_U_LED_BLOCK10.12 U3_U_LED_BLOCK10.18 | length 2.4
  Top Layer w0.5: U3_U_LED_BLOCK10.18 D2_U_LED_BLOCK10.12
NetD2_U_LED_BLOCK10_13: D2_U_LED_BLOCK10.13 U3_U_LED_BLOCK10.17 | length 2.4
  Top Layer w0.5: U3_U_LED_BLOCK10.17 D2_U_LED_BLOCK10.13
NetD2_U_LED_BLOCK10_14: D2_U_LED_BLOCK10.14 U3_U_LED_BLOCK10.16 | length 2.4
  Top Layer w0.5: U3_U_LED_BLOCK10.16 D2_U_LED_BLOCK10.14
NetD2_U_LED_BLOCK10_15: D2_U_LED_BLOCK10.15 U3_U_LED_BLOCK10.15 | length 2.4
  Top Layer w0.5: U3_U_LED_BLOCK10.15 D2_U_LED_BLOCK10.15
NetD2_U_LED_BLOCK10_16: D2_U_LED_BLOCK10.16 U3_U_LED_BLOCK10.14 | length 2.4
  Top Layer w0.5: U3_U_LED_BLOCK10.14 D2_U_LED_BLOCK10.16
NetD2_U_LED_BLOCK10_17: D2_U_LED_BLOCK10.17 U3_U_LED_BLOCK10.13 | length 2.4
  Top Layer w0.5: U3_U_LED_BLOCK10.13 D2_U_LED_BLOCK10.17
NetD2_U_LED_BLOCK10_18: D2_U_LED_BLOCK10.18 U3_U_LED_BLOCK10.12 | length 2.4
  Top Layer w0.5: U3_U_LED_BLOCK10.12 D2_U_LED_BLOCK10.18
NetD2_U_LED_BLOCK10_19: D2_U_LED_BLOCK10.19 U3_U_LED_BLOCK10.11 | length 2.4
  Top Layer w0.5: U3_U_LED_BLOCK10.11 D2_U_LED_BLOCK10.19
NetD2_U_LED_BLOCK10_20: D2_U_LED_BLOCK10.20 U3_U_LED_BLOCK10.10 | length 2.4
  Top Layer w0.5: U3_U_LED_BLOCK10.10 D2_U_LED_BLOCK10.20
NetJ3_1: J3.1 U3_U_LED_BLOCK1.5 | length 81
  Bottom Layer w0.5: U3_U_LED_BLOCK1.5 7.28,37.144 cw(c7.072,36.936) 7.366,36.936 7.366,26.185 ccw(c7.66,26.185) 7.452,25.977 9.073,24.353 ccw(c11.995,29.16) 10.176,23.836 cw(c10.081,23.557) 10.289,23.766 26.965,7.09 26.966,7.089 ccw(c27.173,7.298) 27.173,7.004 J3.1
NetJ3_2: J3.2 U3_U_LED_BLOCK2.5 | length 69.5
  Bottom Layer w0.5: U3_U_LED_BLOCK2.5 22.52,37.017 cw(c22.312,36.809) 22.606,36.809 22.606,25.889 ccw(c22.9,25.889) 22.753,25.634 cw(c22.606,25.379) 22.814,25.587 23.188,25.213 ccw(c26.085,28.109) 25.256,24.097 cw(c25.196,23.809) 25.404,24.018 ; 25.405,24.017 36.743,12.679 ccw(c36.951,12.887) 36.951,12.593 38.48,12.593 cw(c38.48,12.298) 38.688,12.507 42.2,8.995 ccw(c42.408,9.203) 42.408,8.909 69.335,8.909 cw(c69.335,8.615) 69.629,8.615 J3.2
NetJ3_3: J3.3 U3_U_LED_BLOCK3.5 | length 56.5
  Bottom Layer w0.5: U3_U_LED_BLOCK3.5 37.76,37.017 cw(c37.552,36.809) 37.846,36.809 37.846,27.832 ccw(c43.808,27.509) 38.045,25.946 ccw(c40.632,26.647) 38.99,24.529 38.992,24.528 ccw(c39.168,24.763) 39.104,24.476 40.318,24.197 ; 40.319,24.197 cw(c39.244,19.519) 42.627,22.924 55.159,10.392 ccw(c55.367,10.6) 55.367,10.306 70.236,10.306 cw(c70.236,10.012) 70.444,10.22 72.043,8.621 cw(c71.835,8.413) 72.129,8.413 J3.3
NetJ3_4: J3.4 U3_U_LED_BLOCK4.5 | length 43.9
  Bottom Layer w0.5: U3_U_LED_BLOCK4.5 53.254,36.763 cw(c53.046,36.555) 53.34,36.555 53.34,26.238 ccw(c55.136,26.247) 54.609,24.53 cw(c53.756,21.682) 55.86,23.783 55.861,23.782 67.601,12.042 ccw(c67.808,12.251) 67.806,11.957 71.059,11.957 cw(c71.059,11.663) 71.267,11.871 74.543,8.594 cw(c74.335,8.387) 74.629,8.387 J3.4
NetJ3_5: J3.5 U3_U_LED_BLOCK5.5 | length 42
  Bottom Layer w0.5: U3_U_LED_BLOCK5.5 68.494,36.762 cw(c68.286,36.555) 68.58,36.555 68.58,25.667 ccw(c68.874,25.668) 68.665,25.461 69.594,24.532 ccw(c69.803,24.74) 69.803,24.445 77.174,24.445 cw(c77.174,22.832) 78.787,22.832 78.787,11.27 cw(c78.492,11.27) 78.767,11.163 J3.5
NetJ3_6: J3.6 U3_U_LED_BLOCK6.5 | length 37
  Bottom Layer w0.5: J3.6 80.391,7.766 ccw(c80.183,7.974) 80.477,7.973 80.477,13.196 cw(c80.772,13.196) 80.563,13.404 86.654,19.495 ccw(c86.447,19.704) 86.741,19.704 86.741,22.425 ccw(c84.784,22.425) 86.172,23.805 ccw(c83.895,21.537) 84.688,24.651 cw(c84.761,24.936) 84.487,24.828 83.713,26.831 cw(c83.987,26.937) 83.693,26.937 83.693,36.682 ccw(c83.399,36.682) 83.607,36.89 U3_U_LED_BLOCK6.5
NetJ3_7: J3.7 U3_U_LED_BLOCK7.5 | length 46.1
  Bottom Layer w0.5: J3.7@82.132,7.004 cw(c84.462,7.135) 82.803,8.776 ; 82.803,8.776 90.47,16.443 cw(c90.678,16.235) 90.678,16.529 97.409,16.529 ccw(c97.409,16.823) 97.617,16.615 101.766,20.765 ccw(c101.56,20.974) 101.854,20.974 101.854,22.045 ccw(c98.92,22.045) 101.128,23.977 ccw(c99.638,22.673) 100.009,24.618 cw(c100.064,24.907) 99.838,24.719 cw(c102.624,27.009) 99.018,26.995 99.018,36.597 ccw(c98.723,36.597) 98.931,36.805 U3_U_LED_BLOCK7.5
NetJ3_8: J3.8 U3_U_LED_BLOCK8.5 | length 60.2
  Bottom Layer w0.5: J3.8 84.629,8.072 cw(c84.923,8.072) 84.715,8.28 88.179,11.744 cw(c88.387,11.536) 88.387,11.83 109.479,11.83 ccw(c109.479,12.124) 109.687,11.916 117.55,19.779 ccw(c117.341,19.986) 117.634,19.957 ccw(c112.2,20.48) 116.432,23.928 ccw(c116.204,23.742) 116.269,24.029 cw(c116.332,24.316) 116.124,24.108 114.385,25.847 cw(c114.594,26.054) 114.3,26.053 114.3,36.555 ccw(c114.006,36.555) 114.214,36.763 U3_U_LED_BLOCK8.5
NetJ3_9: J3.9 U3_U_LED_BLOCK9.5 | length 73.4
  Bottom Layer w0.5: J3.9 87.129,7.905 cw(c87.423,7.905) 87.215,8.113 88.56,9.458 cw(c88.768,9.25) 88.768,9.544 117.226,9.544 122.471,9.544 ccw(c122.471,9.838) 122.678,9.63 133.083,20.034 ccw(c132.873,20.241) 133.167,20.256 ccw(c126.601,19.945) 131.662,24.14 131.661,24.141 ccw(c131.437,23.95) 131.5,24.238 cw(c132.442,28.524) 129.782,25.034 cw(c129.961,25.267) 129.667,25.265 129.667,36.428 ccw(c129.373,36.428) 129.581,36.635 U3_U_LED_BLOCK9.5
NetJ3_10: J3.10 U3_U_LED_BLOCK10.5 | length 87.9
  Bottom Layer w0.5: J3.10 89.629,6.269 ccw(c89.923,6.27) 89.715,6.062 91.609,4.168 ccw(c91.816,4.377) 91.814,4.083 131.831,4.083 ccw(c131.831,4.377) 132.039,4.169 147.996,20.126 ccw(c147.788,20.334) 148.082,20.334 148.082,21.863 ccw(c144.973,21.863) 147.172,24.06 ccw(c146.963,23.853) 147.082,24.122 146.01,24.598 cw(c146.13,24.867) 145.923,24.657 144.611,25.969 cw(c144.82,26.176) 144.526,26.175 144.526,36.809 ccw(c144.232,36.809) 144.44,37.016 U3_U_LED_BLOCK10.5
NetR7_U_LED_BLOCK1_1: R7_U_LED_BLOCK1.1 R8_U_LED_BLOCK1.2 U3_U_LED_BLOCK1.8 | length 37.8
  Top Layer w0.5: R8_U_LED_BLOCK1.2 8.636,19.601 R7_U_LED_BLOCK1.1
  Bottom Layer w0.5: 4.15,27.118 cw(c4.358,27.325) 4.064,27.325 4.064,44.81 cw(c4.358,44.81) 4.15,45.018 U3_U_LED_BLOCK1.8 ; 4.15,27.117 4.752,26.516 R8_U_LED_BLOCK1.2
NetR7_U_LED_BLOCK2_1: R7_U_LED_BLOCK2.1 R8_U_LED_BLOCK2.2 U3_U_LED_BLOCK2.8 | length 37.8
  Top Layer w0.5: R8_U_LED_BLOCK2.2 23.663,19.687 R7_U_LED_BLOCK2.1
  Bottom Layer w0.5: 19.177,27.204 19.778,26.602 R8_U_LED_BLOCK2.2 ; 19.177,45.104 U3_U_LED_BLOCK2.8 ; 19.39,27.118 cw(c19.598,27.325) 19.304,27.325 19.304,44.81 cw(c19.598,44.81) 19.39,45.018
NetR7_U_LED_BLOCK3_1: R7_U_LED_BLOCK3.1 R8_U_LED_BLOCK3.2 U3_U_LED_BLOCK3.8 | length 37.8
  Top Layer w0.5: R8_U_LED_BLOCK3.2 38.903,19.687 R7_U_LED_BLOCK3.1
  Bottom Layer w0.5: 34.416,27.204 cw(c34.625,27.412) 34.331,27.412 34.331,44.896 cw(c34.625,44.896) 34.417,45.104 U3_U_LED_BLOCK3.8 ; 34.417,27.204 35.018,26.602 R8_U_LED_BLOCK3.2
NetR7_U_LED_BLOCK4_1: R7_U_LED_BLOCK4.1 R8_U_LED_BLOCK4.2 U3_U_LED_BLOCK4.8 | length 37.8
  Top Layer w0.5: R8_U_LED_BLOCK4.2 54.143,19.687 R7_U_LED_BLOCK4.1
  Bottom Layer w0.5: 49.656,27.204 cw(c49.865,27.412) 49.571,27.412 49.571,44.896 cw(c49.865,44.896) 49.657,45.104 U3_U_LED_BLOCK4.8 ; 49.657,27.204 50.258,26.602 R8_U_LED_BLOCK4.2
NetR7_U_LED_BLOCK5_1: R7_U_LED_BLOCK5.1 R8_U_LED_BLOCK5.2 U3_U_LED_BLOCK5.8 | length 37.8
  Top Layer w0.5: R8_U_LED_BLOCK5.2 69.383,19.687 R7_U_LED_BLOCK5.1
  Bottom Layer w0.5: 64.896,27.204 cw(c65.105,27.412) 64.811,27.412 64.811,44.896 cw(c65.105,44.896) 64.897,45.104 U3_U_LED_BLOCK5.8 ; 64.897,27.204 65.498,26.602 R8_U_LED_BLOCK5.2
NetR7_U_LED_BLOCK6_1: R7_U_LED_BLOCK6.1 R8_U_LED_BLOCK6.2 U3_U_LED_BLOCK6.8 | length 37.8
  Top Layer w0.5: R8_U_LED_BLOCK6.2 84.623,19.687 R7_U_LED_BLOCK6.1
  Bottom Layer w0.5: 80.136,27.204 cw(c80.345,27.412) 80.051,27.412 80.051,44.896 cw(c80.345,44.896) 80.137,45.104 U3_U_LED_BLOCK6.8 ; 80.137,27.204 80.738,26.602 R8_U_LED_BLOCK6.2
NetR7_U_LED_BLOCK7_1: R7_U_LED_BLOCK7.1 R8_U_LED_BLOCK7.2 U3_U_LED_BLOCK7.8 | length 37.8
  Top Layer w0.5: R8_U_LED_BLOCK7.2 99.863,19.687 R7_U_LED_BLOCK7.1
  Bottom Layer w0.5: 95.376,27.204 cw(c95.585,27.412) 95.291,27.412 95.291,44.896 cw(c95.585,44.896) 95.377,45.104 U3_U_LED_BLOCK7.8 ; 95.377,27.204 95.978,26.602 R8_U_LED_BLOCK7.2
NetR7_U_LED_BLOCK8_1: R7_U_LED_BLOCK8.1 R8_U_LED_BLOCK8.2 U3_U_LED_BLOCK8.8 | length 37.8
  Top Layer w0.5: R8_U_LED_BLOCK8.2 115.103,19.687 R7_U_LED_BLOCK8.1
  Bottom Layer w0.5: 110.616,27.204 cw(c110.825,27.412) 110.531,27.412 110.531,44.896 cw(c110.825,44.896) 110.617,45.104 U3_U_LED_BLOCK8.8 ; 110.617,27.204 111.218,26.602 R8_U_LED_BLOCK8.2
NetR7_U_LED_BLOCK9_1: R7_U_LED_BLOCK9.1 R8_U_LED_BLOCK9.2 U3_U_LED_BLOCK9.8 | length 37.8
  Top Layer w0.5: R8_U_LED_BLOCK9.2 130.343,19.687 R7_U_LED_BLOCK9.1
  Bottom Layer w0.5: 125.856,27.204 cw(c126.065,27.412) 125.771,27.412 125.771,44.896 cw(c126.065,44.896) 125.857,45.104 U3_U_LED_BLOCK9.8 ; 125.857,27.204 126.458,26.602 R8_U_LED_BLOCK9.2
NetR7_U_LED_BLOCK10_1: R7_U_LED_BLOCK10.1 R8_U_LED_BLOCK10.2 U3_U_LED_BLOCK10.8 | length 37.8
  Top Layer w0.5: R8_U_LED_BLOCK10.2 145.583,19.687 R7_U_LED_BLOCK10.1
  Bottom Layer w0.5: 141.096,27.204 cw(c141.305,27.412) 141.011,27.412 141.011,44.896 cw(c141.305,44.896) 141.097,45.104 U3_U_LED_BLOCK10.8 ; 141.097,27.204 141.698,26.602 R8_U_LED_BLOCK10.2
REFOUT_U_LED_BLOCK1: R8_U_LED_BLOCK1.1 U3_U_LED_BLOCK1.6 U3_U_LED_BLOCK1.7 | length 32.8
  Top Layer w0.5: 4.15,18.118 cw(c4.358,18.325) 4.064,18.325 4.064,39.603 cw(c4.358,39.603) 4.15,39.811 5.588,41.249 U3_U_LED_BLOCK1.6 U3_U_LED_BLOCK1.7 ; 4.15,18.117 R8_U_LED_BLOCK1.1
REFOUT_U_LED_BLOCK2: R8_U_LED_BLOCK2.1 U3_U_LED_BLOCK2.6 U3_U_LED_BLOCK2.7 | length 32.8
  Top Layer w0.5: 19.177,18.204 R8_U_LED_BLOCK2.1 ; 19.177,39.897 20.615,41.335 U3_U_LED_BLOCK2.6 U3_U_LED_BLOCK2.7 ; 19.39,18.118 cw(c19.598,18.325) 19.304,18.325 19.304,39.603 cw(c19.598,39.603) 19.39,39.811
REFOUT_U_LED_BLOCK3: R8_U_LED_BLOCK3.1 U3_U_LED_BLOCK3.6 U3_U_LED_BLOCK3.7 | length 32.8
  Top Layer w0.5: 34.416,18.204 cw(c34.625,18.412) 34.331,18.412 34.331,39.689 cw(c34.625,39.689) 34.417,39.897 35.855,41.335 U3_U_LED_BLOCK3.6 U3_U_LED_BLOCK3.7 ; 34.417,18.204 R8_U_LED_BLOCK3.1
REFOUT_U_LED_BLOCK4: R8_U_LED_BLOCK4.1 U3_U_LED_BLOCK4.6 U3_U_LED_BLOCK4.7 | length 32.8
  Top Layer w0.5: 49.656,18.204 cw(c49.865,18.412) 49.571,18.412 49.571,39.689 cw(c49.865,39.689) 49.657,39.897 51.095,41.335 U3_U_LED_BLOCK4.6 U3_U_LED_BLOCK4.7 ; 49.657,18.204 R8_U_LED_BLOCK4.1
REFOUT_U_LED_BLOCK5: R8_U_LED_BLOCK5.1 U3_U_LED_BLOCK5.6 U3_U_LED_BLOCK5.7 | length 32.8
  Top Layer w0.5: 64.896,18.204 cw(c65.105,18.412) 64.811,18.412 64.811,39.689 cw(c65.105,39.689) 64.897,39.897 66.335,41.335 U3_U_LED_BLOCK5.6 U3_U_LED_BLOCK5.7 ; 64.897,18.204 R8_U_LED_BLOCK5.1
REFOUT_U_LED_BLOCK6: R8_U_LED_BLOCK6.1 U3_U_LED_BLOCK6.6 U3_U_LED_BLOCK6.7 | length 32.8
  Top Layer w0.5: 80.136,18.204 cw(c80.345,18.412) 80.051,18.412 80.051,39.689 cw(c80.345,39.689) 80.137,39.897 81.575,41.335 U3_U_LED_BLOCK6.6 U3_U_LED_BLOCK6.7 ; 80.137,18.204 R8_U_LED_BLOCK6.1
REFOUT_U_LED_BLOCK7: R8_U_LED_BLOCK7.1 U3_U_LED_BLOCK7.6 U3_U_LED_BLOCK7.7 | length 32.8
  Top Layer w0.5: 95.376,18.204 cw(c95.585,18.412) 95.291,18.412 95.291,39.689 cw(c95.585,39.689) 95.377,39.897 96.815,41.335 U3_U_LED_BLOCK7.6 U3_U_LED_BLOCK7.7 ; 95.377,18.204 R8_U_LED_BLOCK7.1
REFOUT_U_LED_BLOCK8: R8_U_LED_BLOCK8.1 U3_U_LED_BLOCK8.6 U3_U_LED_BLOCK8.7 | length 32.8
  Top Layer w0.5: 110.616,18.204 cw(c110.825,18.412) 110.531,18.412 110.531,39.689 cw(c110.825,39.689) 110.617,39.897 112.055,41.335 U3_U_LED_BLOCK8.6 U3_U_LED_BLOCK8.7 ; 110.617,18.204 R8_U_LED_BLOCK8.1
REFOUT_U_LED_BLOCK9: R8_U_LED_BLOCK9.1 U3_U_LED_BLOCK9.6 U3_U_LED_BLOCK9.7 | length 32.8
  Top Layer w0.5: 125.856,18.204 cw(c126.065,18.412) 125.771,18.412 125.771,39.689 cw(c126.065,39.689) 125.857,39.897 127.295,41.335 U3_U_LED_BLOCK9.6 U3_U_LED_BLOCK9.7 ; 125.857,18.204 R8_U_LED_BLOCK9.1
REFOUT_U_LED_BLOCK10: R8_U_LED_BLOCK10.1 U3_U_LED_BLOCK10.6 U3_U_LED_BLOCK10.7 | length 32.8
  Top Layer w0.5: 141.096,18.204 cw(c141.305,18.412) 141.011,18.412 141.011,39.689 cw(c141.305,39.689) 141.097,39.897 142.535,41.335 U3_U_LED_BLOCK10.6 U3_U_LED_BLOCK10.7 ; 141.097,18.204 R8_U_LED_BLOCK10.1
Vs+: D2_U_LED_BLOCK1.1 D2_U_LED_BLOCK1.2 D2_U_LED_BLOCK1.3 D2_U_LED_BLOCK1.4 D2_U_LED_BLOCK1.5 D2_U_LED_BLOCK1.6 D2_U_LED_BLOCK1.7 D2_U_LED_BLOCK1.8 D2_U_LED_BLOCK1.9 D2_U_LED_BLOCK1.10 D2_U_LED_BLOCK2.1 D2_U_LED_BLOCK2.2 D2_U_LED_BLOCK2.3 D2_U_LED_BLOCK2.4 D2_U_LED_BLOCK2.5 D2_U_LED_BLOCK2.6 D2_U_LED_BLOCK2.7 D2_U_LED_BLOCK2.8 D2_U_LED_BLOCK2.9 D2_U_LED_BLOCK2.10 D2_U_LED_BLOCK3.1 D2_U_LED_BLOCK3.2 D2_U_LED_BLOCK3.3 D2_U_LED_BLOCK3.4 D2_U_LED_BLOCK3.5 D2_U_LED_BLOCK3.6 D2_U_LED_BLOCK3.7 D2_U_LED_BLOCK3.8 D2_U_LED_BLOCK3.9 D2_U_LED_BLOCK3.10 D2_U_LED_BLOCK4.1 D2_U_LED_BLOCK4.2 D2_U_LED_BLOCK4.3 D2_U_LED_BLOCK4.4 D2_U_LED_BLOCK4.5 D2_U_LED_BLOCK4.6 D2_U_LED_BLOCK4.7 D2_U_LED_BLOCK4.8 D2_U_LED_BLOCK4.9 D2_U_LED_BLOCK4.10 D2_U_LED_BLOCK5.1 D2_U_LED_BLOCK5.2 D2_U_LED_BLOCK5.3 D2_U_LED_BLOCK5.4 D2_U_LED_BLOCK5.5 D2_U_LED_BLOCK5.6 D2_U_LED_BLOCK5.7 D2_U_LED_BLOCK5.8 D2_U_LED_BLOCK5.9 D2_U_LED_BLOCK5.10 D2_U_LED_BLOCK6.1 D2_U_LED_BLOCK6.2 D2_U_LED_BLOCK6.3 D2_U_LED_BLOCK6.4 D2_U_LED_BLOCK6.5 D2_U_LED_BLOCK6.6 D2_U_LED_BLOCK6.7 D2_U_LED_BLOCK6.8 D2_U_LED_BLOCK6.9 D2_U_LED_BLOCK6.10 D2_U_LED_BLOCK7.1 D2_U_LED_BLOCK7.2 D2_U_LED_BLOCK7.3 D2_U_LED_BLOCK7.4 D2_U_LED_BLOCK7.5 D2_U_LED_BLOCK7.6 D2_U_LED_BLOCK7.7 D2_U_LED_BLOCK7.8 D2_U_LED_BLOCK7.9 D2_U_LED_BLOCK7.10 D2_U_LED_BLOCK8.1 D2_U_LED_BLOCK8.2 D2_U_LED_BLOCK8.3 D2_U_LED_BLOCK8.4 D2_U_LED_BLOCK8.5 D2_U_LED_BLOCK8.6 D2_U_LED_BLOCK8.7 D2_U_LED_BLOCK8.8 D2_U_LED_BLOCK8.9 D2_U_LED_BLOCK8.10 D2_U_LED_BLOCK9.1 D2_U_LED_BLOCK9.2 D2_U_LED_BLOCK9.3 D2_U_LED_BLOCK9.4 D2_U_LED_BLOCK9.5 D2_U_LED_BLOCK9.6 D2_U_LED_BLOCK9.7 D2_U_LED_BLOCK9.8 D2_U_LED_BLOCK9.9 D2_U_LED_BLOCK9.10 D2_U_LED_BLOCK10.1 D2_U_LED_BLOCK10.2 D2_U_LED_BLOCK10.3 D2_U_LED_BLOCK10.4 D2_U_LED_BLOCK10.5 D2_U_LED_BLOCK10.6 D2_U_LED_BLOCK10.7 D2_U_LED_BLOCK10.8 D2_U_LED_BLOCK10.9 D2_U_LED_BLOCK10.10 J3.11 U3_U_LED_BLOCK1.3 U3_U_LED_BLOCK1.9 U3_U_LED_BLOCK2.3 U3_U_LED_BLOCK2.9 U3_U_LED_BLOCK3.3 U3_U_LED_BLOCK3.9 U3_U_LED_BLOCK4.3 U3_U_LED_BLOCK4.9 U3_U_LED_BLOCK5.3 U3_U_LED_BLOCK5.9 U3_U_LED_BLOCK6.3 U3_U_LED_BLOCK6.9 U3_U_LED_BLOCK7.3 U3_U_LED_BLOCK7.9 U3_U_LED_BLOCK8.3 U3_U_LED_BLOCK8.9 U3_U_LED_BLOCK9.3 U3_U_LED_BLOCK9.9 U3_U_LED_BLOCK10.3 U3_U_LED_BLOCK10.9

## Polygon pours and split planes (outlines as drawn)
GND on GND (split plane): 159.49,0.51 0.51,0.51 0.51,54.49 159.49,54.49
Vs+ on Vs+ (split plane): 159.49,0.51 0.51,0.51 0.51,54.49 159.49,54.49

## Silkscreen, mask and mechanical layers (free items; w line width, h text height)
Top Overlay:
  lines w0.1: 2.5,2.5 157.5,2.5 157.5,52.5 2.5,52.5 2.5,2.5
  text "ELECTRO SQUAD" at 4.999,5.215 h4
Bottom Overlay:
  lines w0.254: 2.5,2.5 157.5,2.5 157.5,52.5 2.5,52.5 2.5,2.5